# Altium PCB Suiveur.PcbDoc
Units mm, origin at the board's own origin, x right, y up, seen from the top; angles counter-clockwise.
Board outline 40 x 50 mm, 2 copper layers (Top Layer, Bottom Layer), stack 1.534 mm thick; 12 components, 11 nets, 38 pads, 10 vias.
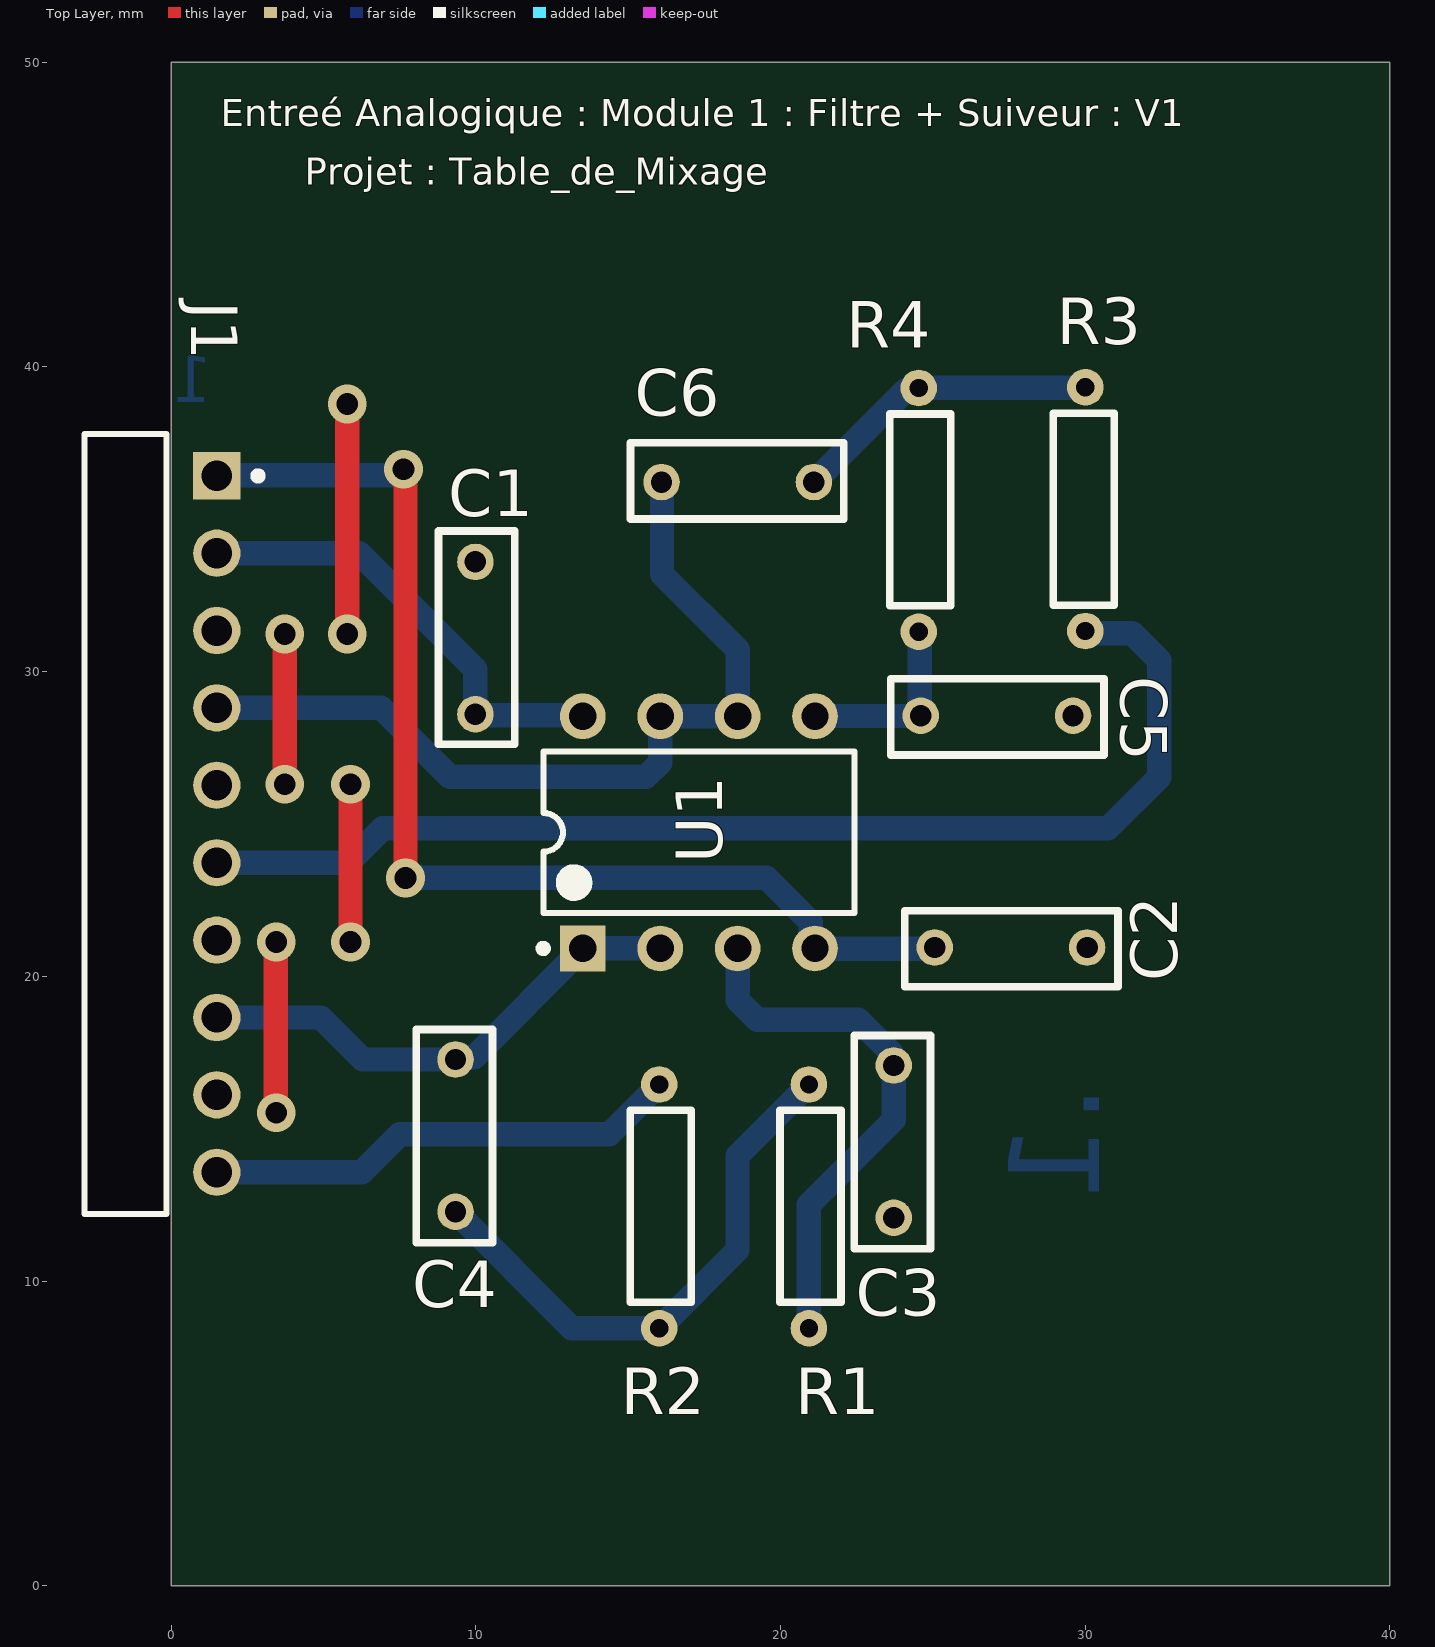
[diagram p0: Top Layer view]
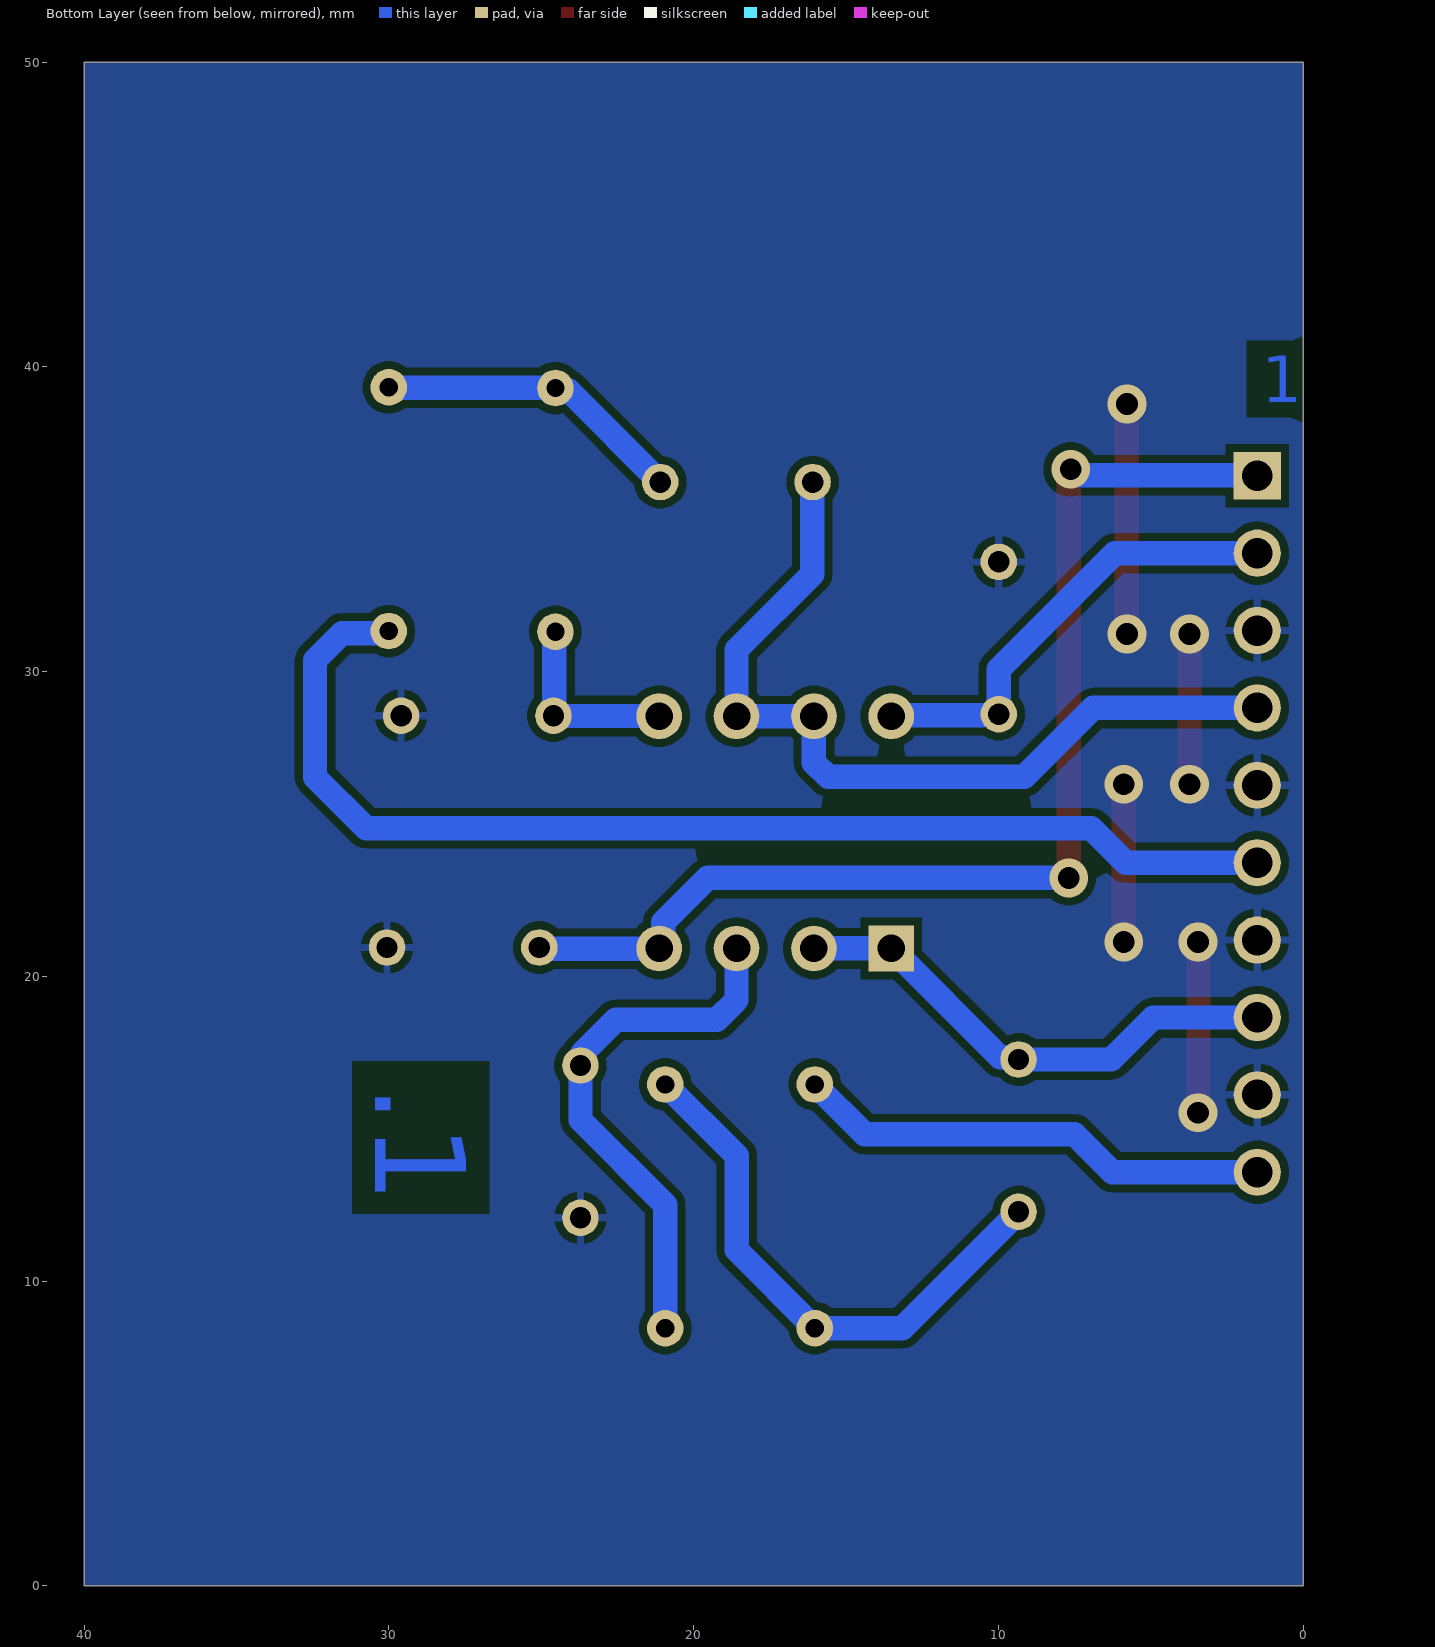
[diagram p1: Bottom Layer view, seen from below]

## Layer stack, top to bottom
Top Solder: solder mask 0.0127, Solder Resist, Dk 3.3
Top Layer: signal copper 0.0178
Dielectric1: core 1.4986, FR-4, Dk 4.3
Bottom Layer: signal copper 0.0178
Bottom Solder: solder mask 0.0127, Solder Resist, Dk 3.3

## Board outline
0,0 0,50 40,50 40,0

## Design rules (kind name [scope] priority, off if disabled: settings)
Clearance [All] p1: gap=0.254 ignorepadtopadclearanceinfootprint=FALSE
DiffPairsRouting [All] p1: maxlimit=0.254 minlimit=0.254 mostfreqgap=0.254 toplayer_minwidth=0.254 toplayer_maxwidth=0.254 toplayer_prefwidth=0.254 bottomlayer_minwidth=0.254 bottomlayer_maxwidth=0.254 bottomlayer_prefwidth=0.254 maxuncoupledlength=12.7
HoleSize [All] p1: absolutevalues=TRUE maxlimit=7.62 minlimit=0.254 maxpercent=80.000 minpercent=20.000
MinimumAnnularRing [All] p1: minimumring=0.1
PasteMaskExpansion [All] p1: expansion=0.254
PlaneClearance [All] p1: clearance=0.381
PlaneConnect [All] p1: pad.planeconnectstyle=Relief pad.reliefexpansion=0.508 pad.reliefentries=4 pad.reliefconductorwidth=0.254 pad.reliefairgap=0.254 via.planeconnectstyle=Direct via.reliefexpansion=0.508 via.reliefentries=4 via.reliefconductorwidth=0.254 via.reliefairgap=0.254
PolygonConnect [All] p1: thpad.connectstyle=Relief thpad.reliefconductorwidth=0.254 thpad.reliefentries=4 thpad.polygonreliefangle="90 Angle" thpad.airgapwidth=0.254 smdpad.connectstyle=Relief smdpad.reliefconductorwidth=0.254 smdpad.reliefentries=4 smdpad.polygonreliefangle="90 Angle" smdpad.airgapwidth=0.254 via.connectstyle=Direct via.reliefconductorwidth=0.254 via.reliefentries=4 via.polygonreliefangle="90 Angle" via.airgapwidth=0.254
RoutingVias [All] p1: holewidth=0.254 width=0.508 viastyle="Through Hole" minholewidth=0.254 minwidth=0.508 maxholewidth=0.8 maxwidth=1.5
SMDNeckDown [All] p1: percent=100.000
SilkToSilkClearance [All] p1: silktosilkclearance=0.1
SilkToSolderMaskClearance SilkscreenOverComponentPads [IsPad] p1: minsilkscreentomaskgap=0 clearancetoexposedcopper=TRUE
SolderMaskExpansion [All] p1: expansion=0.254 istentingtop=FALSE
SupplyNets "Schematic Supply Nets" [InNet('GND')] p1: voltage=0.000
Width [All] p1: maxlimit=1 minlimit=0.254 preferedwidth=0.8 minimp=50.000000 maximp=50.000000 favimp=50.000000
23 further rules are at their usual default settings.

## Classes and differential pairs
component class Suiveur: C1 C2 C3 C4 C5 C6 J1 R1 R3 R4 U1

## Components (designator, comment, footprint, x,y, rotation, side; value= is the part's Value field where it differs from the comment)
C1 "Cap_6.0*2.5*6mm" Cap_6.0%2A2.5%2A6mm 9.986,33.602 r270 top value=100nF
C2 "Cap_6.0*2.5*6mm" Cap_6.0%2A2.5%2A6mm 30.064,20.947 r180 top value=100nF
C3 "Cap_6.0*2.5*6mm" Cap_6.0%2A2.5%2A6mm 23.716,12.076 r90 top value=330pF
C4 "Cap_6.0*2.5*6mm" Cap_6.0%2A2.5%2A6mm 9.335,12.27 r90 top value=820pF
C5 "Cap_6.0*2.5*6mm" Cap_6.0%2A2.5%2A6mm 29.603,28.556 r180 top value=330pF
C6 "Cap_6.0*2.5*6mm" Cap_6.0%2A2.5%2A6mm 16.096,36.222 r0 top value=820pF
J1 "90121-0770" FP-90121-0770-MFG -1.5,25 r270 top locked
R1 "Res_3.5x6.5mm_TH" Res_Axial_3.5x6.5mm_TH 20.932,16.452 r270 top value=18k
R2 "Res_3.5x6.5mm_TH" Res_Axial_3.5x6.5mm_TH 16.022,16.452 r270 top value=8.2k
R3 "Res_3.5x6.5mm_TH" Res_Axial_3.5x6.5mm_TH 30.007,31.334 r90 top value=8.2k
R4 "Res_3.5x6.5mm_TH" Res_Axial_3.5x6.5mm_TH 24.537,39.31 r270 top value=18k
U1 "TL082ACP" P0008A 17.322,24.726 r90 top

## Footprints (in the part's own frame and the unit in brackets; to place one, negate y for a bottom-side part, rotate by r counter-clockwise, add the part's x,y. Pads: shape width x height; smd on the part's side, far side on the other; paste and mask are expansions set on the pad)
Cap_6.0%2A2.5%2A6mm [mm]
  round 1.2 hole 0.7: 1(0,0) 2(5,0)
  silkscreen extent -1.02,-1.21 5.98,1.29, body extent -1.02,-1.21 5.98,1.29, height 6
FP-90121-0770-MFG [mm]
  rect 1.55x1.55 hole 1 paste-2539.97 mask+0: 1(-11.43,3)
  round 1.55 hole 1 paste-2539.97 mask+0: 2(-8.89,3) 3(-6.35,3) 4(-3.81,3) 5(-1.27,3) 6(1.27,3) 7(3.81,3) 8(6.35,3) 9(8.89,3) 10(11.43,3)
  silkscreen extent -12.8,-1.35 12.8,4.47, body extent -12.9,-8.4 12.9,3.88, height 0.25
P0008A [mm] "DIP, 8-Leads, Body 10.15x6.6mm, Pitch 2.54mm"
  rect 1.5x1.5 hole 0.9: 1(-3.81,3.81)
  round 1.5 hole 0.9: 2(-3.81,1.27) 3(-3.81,-1.27) 4(-3.81,-3.81) 5(3.81,-3.81) 6(3.81,-1.27) 7(3.81,1.27) 8(3.81,3.81)
  silkscreen extent -3.93,-5.1 2.65,5.23, body extent -3.95,-5.07 3.95,5.07, height 5.08
Res_Axial_3.5x6.5mm_TH [mm]
  round 1.2 hole 0.6: 0(0,0) 1(8,0)
  silkscreen extent 0.85,-0.95 7.15,1.05, body extent 0.85,-1 7.15,1, height 2.1

## Part data
J1: library part CMP-04776-001047-1, "CONN HEADER R/A 10POS 2.54MM", Color=Black, Contact Resistance=20mR, Current Rating=3A, Insulation Resistance=5GR, Max Operating Temperature=125°C, Min Operating Temperature=-55°C, Package Quantity=1, Voltage Rating=350V, Connector Type="Male Pin", Contact Material=Brass, Contact Mating Length=0.266inch, Contact Plating=Gold, Contact Type="Male Pin", Gender=Male, Glow Wire Compliant=Non-compliant, Housing Color=Black, Housing Material=Polyester, Lead Free="Lead Free", Lead Pitch=2.54mm, Material=Glass, Mount="Through Hole", Number of Circuits=9, Number of Contacts=10, Number of Poles=10, Number of Positions=10, Number of Rows=1, Orientation="Right Angle", Packaging=Bulk, Pitch=2.54mm, Radiation Hardening=No, RoHS Compliant=Yes, Series="C-Grid III™ 90121", System=Connector, Termination=Solder, Voltage Rating (AC)=350V, Working Voltage=350V
U1: library part CMP-0017-00991-2, "JFET-Input Operational Amplifier, 7 to 36 V, 0 to 70 degC, 8-pin DIP (P8), Pb-Free (RoHS)", Manufacturer="Texas Instruments", Rating=Catalog, Total Supply Voltage(Max)(+5V is 5, +/-5V is 10)=36, Total Supply Voltage(Min)(+5V is 5, +/-5V is 10)=7, CMRR(Min)(dB)=75, Code_JEDEC=MS-001, ComponentLink1Description="Manufacturer URL", ComponentLink1URL=http://www.ti.com/, ComponentLink2Description=Datasheet, ComponentLink2URL=http://www.ti.com/lit/ds/symlink/tl082a.pdf, ComponentLink3Description="Package Specification", ComponentLink3URL=http://www.ti.com/litv/pdf/mpdi001b, DatasheetVersion=SLOS081G, Eco-Plan="Pb-Free (RoHS)", GBW(Typ)(MHz)=3, IIB(Max)(pA)=200, Iq per channel(Max)(mA)=2.8, Mounting Technology="Through Hole", Number of Channels=2, Offset Drift(Typ)(uV/C)=18, PackageDescription="8-Pin Plastic In-Line, Body 9.59 x 6.35 mm, Pitch 2.54 mm", PackageReference=P0008A, PackageVersion="4040082/E, 04/2010", PartNumber=TL082ACP, Slew Rate(Typ)(V/us)=13, Sub Family="General Purpose Amplifier, High Supply Voltage Amplifier (>=30V)", Vio (25C)(Max)(mV)=6, Vn at 1kHz(Typ)(nV/rtHz)=18

## Via types
v1: diameter 1.27, hole 0.711, Top Layer to Bottom Layer, 10 vias

## Nets (pads, with @x,y where several pads share a name; then routed paths per layer and width w, separated by ;. In a path a pad name is that pad's centre, name@x,y a point inside that pad or via, vN(x,y) a via of type N, cw(c..) or ccw(c..) an arc to the next point about the centre after c; other vN are vias at no path point)
12V: C1.2 J1.2 U1.8 | length 15.2
  Bottom Layer w0.8: J1.2 6.178,33.89 9.986,30.082 C1.2 10.019,28.569 13.479,28.569 U1.8 U1.8@13.436,28.612
-12V: C2.2 J1.1 U1.4 | length 38.5
  Top Layer w0.8: v1(7.628,36.641) 7.692,36.578 v1(7.692,23.23)
  Bottom Layer w0.8: J1.1 1.521,36.451 7.31,36.451 7.501,36.641 v1(7.628,36.641) ; v1(7.692,23.23) 19.541,23.23 20.999,21.773 20.999,21.05 U1.4 ; U1.4@21.144,20.904 C2.2@25.185,20.904
GND: C1.1 C2.1 C3.1 C5.1 J1.3 J1.5 J1.7 J1.9 | length 23.3
  Top Layer w0.8: v1@3.429,15.546 3.429,20.912 3.646,21.129 v1@3.665,21.129 ; v1(3.724,26.307) v1(3.724,31.239) ; v1(5.779,31.239) v1(5.779,38.784) ; v1(5.888,21.129) v1(5.888,26.307)
  other v1: 3.448,15.527 3.448,21.129
NetC3_2: C3.2 R1.1 U1.3 | length 17.7
  Bottom Layer w0.8: U1.3 18.592,19.221 19.237,18.577 22.551,18.577 23.639,17.489 23.639,17.152 C3.2 23.716,15.283 20.932,12.5 R1.1
NetC4_1: C4.1 R1.0 R2.1 | length 18.3
  Bottom Layer w0.8: C4.1 13.154,8.452 R2.1 18.587,11.017 18.587,14.106 R1.0
NetC5_2: C5.2 R4.1 U1.5 | length 6.3
  Bottom Layer w0.8: U1.5 21.142,28.546 24.593,28.546 C5.2 24.57,28.589 24.57,31.277 R4.1
NetC6_2: C6.2 R3.1 R4.0 | length 10.2
  Bottom Layer w0.8: C6.2 24.107,39.233 24.46,39.233 R4.0 24.548,39.322 29.995,39.322 R3.1
V_Suiveur_1: C4.2 J1.8 U1.1 U1.2 | length 16.6
  Bottom Layer w0.8: J1.8 4.912,18.65 6.291,17.27 C4.2 9.412,17.347 9.944,17.347 U1.1 U1.2
V_Suiveur_2: C6.1 J1.4 U1.6 U1.7 | length 28.5
  Bottom Layer w0.8: J1.4 6.886,28.81 9.15,26.546 15.584,26.546 16.052,27.015 U1.7 U1.6 18.592,30.716 16.127,33.182 16.111,33.197 16.111,36.207 C6.1
Vin_1: J1.10 R2.0 | length 15.7
  Bottom Layer w0.8: J1.10 6.254,13.57 7.501,14.817 14.388,14.817 R2.0
Vin_2: J1.6 R3.0 | length 38.7
  Bottom Layer w0.8: J1.6 5.815,23.73 6.944,24.859 30.748,24.859 32.427,26.539 32.427,30.372 31.542,31.257 30.083,31.257 R3.0

## Polygon pours and split planes (outlines as drawn)
GND on Bottom Layer "GND_L02_P000" (solid, pour order 0): 0,0 40,0 40,50 0,50

## Other copper
Bottom Layer:
  text "1" at 1.351,38.84 h1.52
  text ".1" at 30.457,16.463 h3 r90

## Silkscreen, mask and mechanical layers (free items; w line width, h text height)
Top Overlay:
  text "Entreé Analogique : Module 1 : Filtre + Suiveur : V1" at 1.625,47.599 h1.52
  text "Projet : Table_de_Mixage" at 4.392,45.684 h1.52